# Altium PCB PCB1_Young.PcbDoc
Units mm, origin at the board's own origin, x right, y up, seen from the top; angles counter-clockwise.
Board outline 87.08 x 47.89 mm, 2 copper layers (Top Layer, Bottom Layer); 29 components, 26 nets, 126 pads, 0 vias.
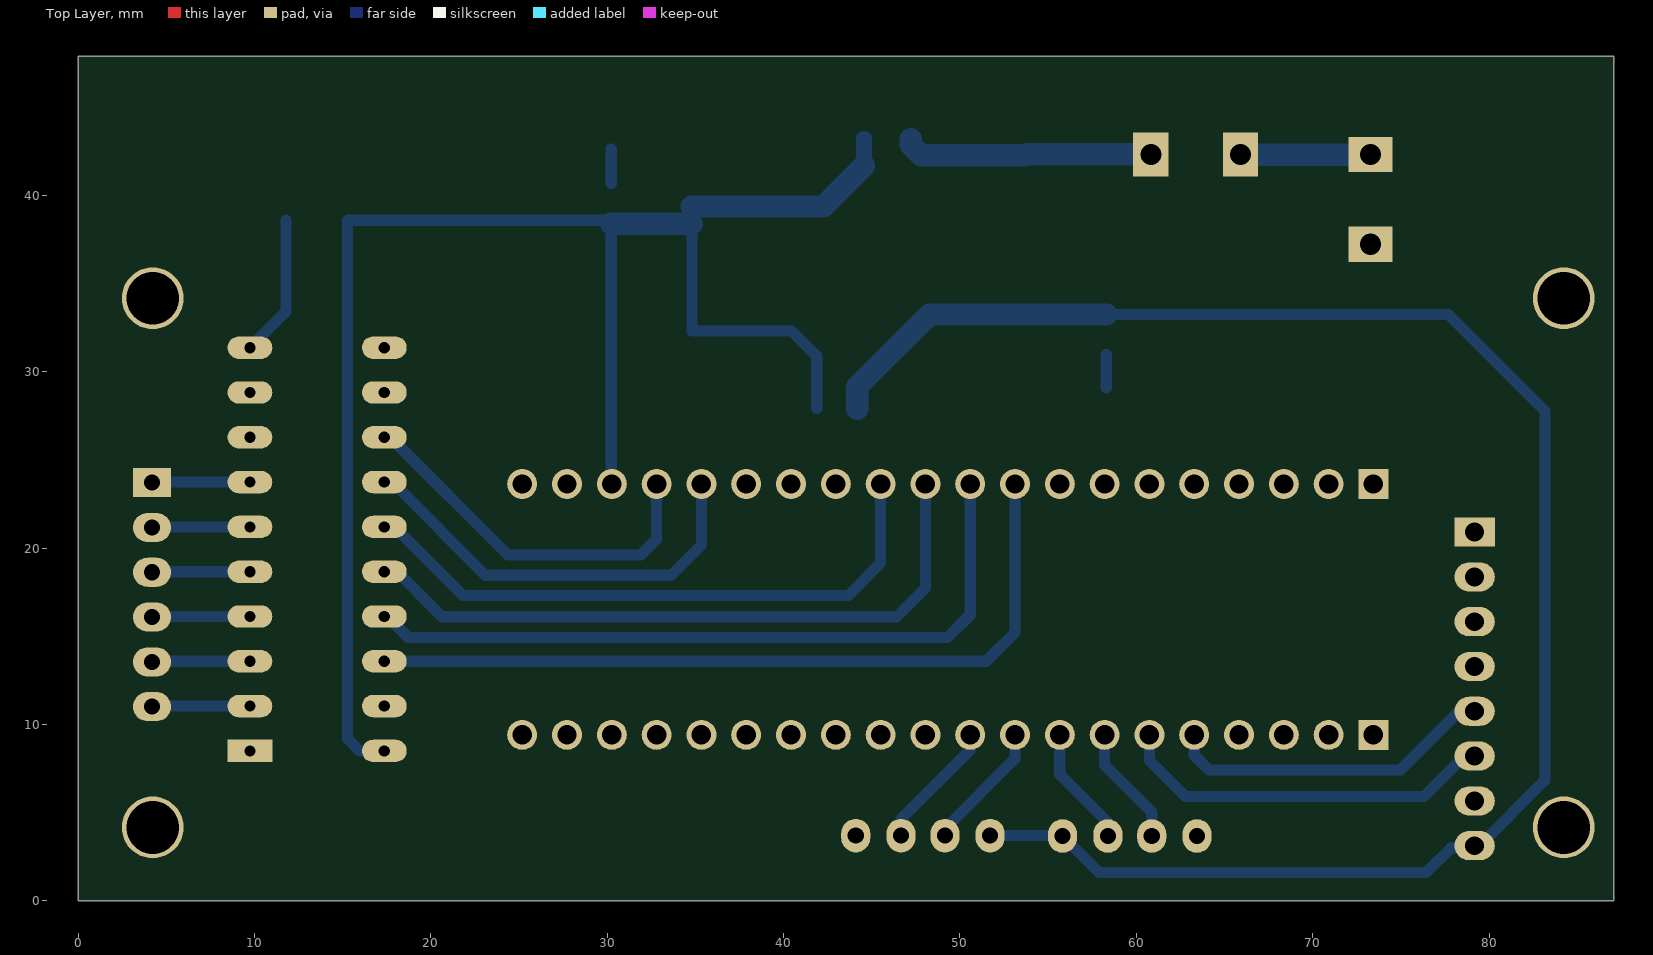
[diagram p0: Top Layer view]
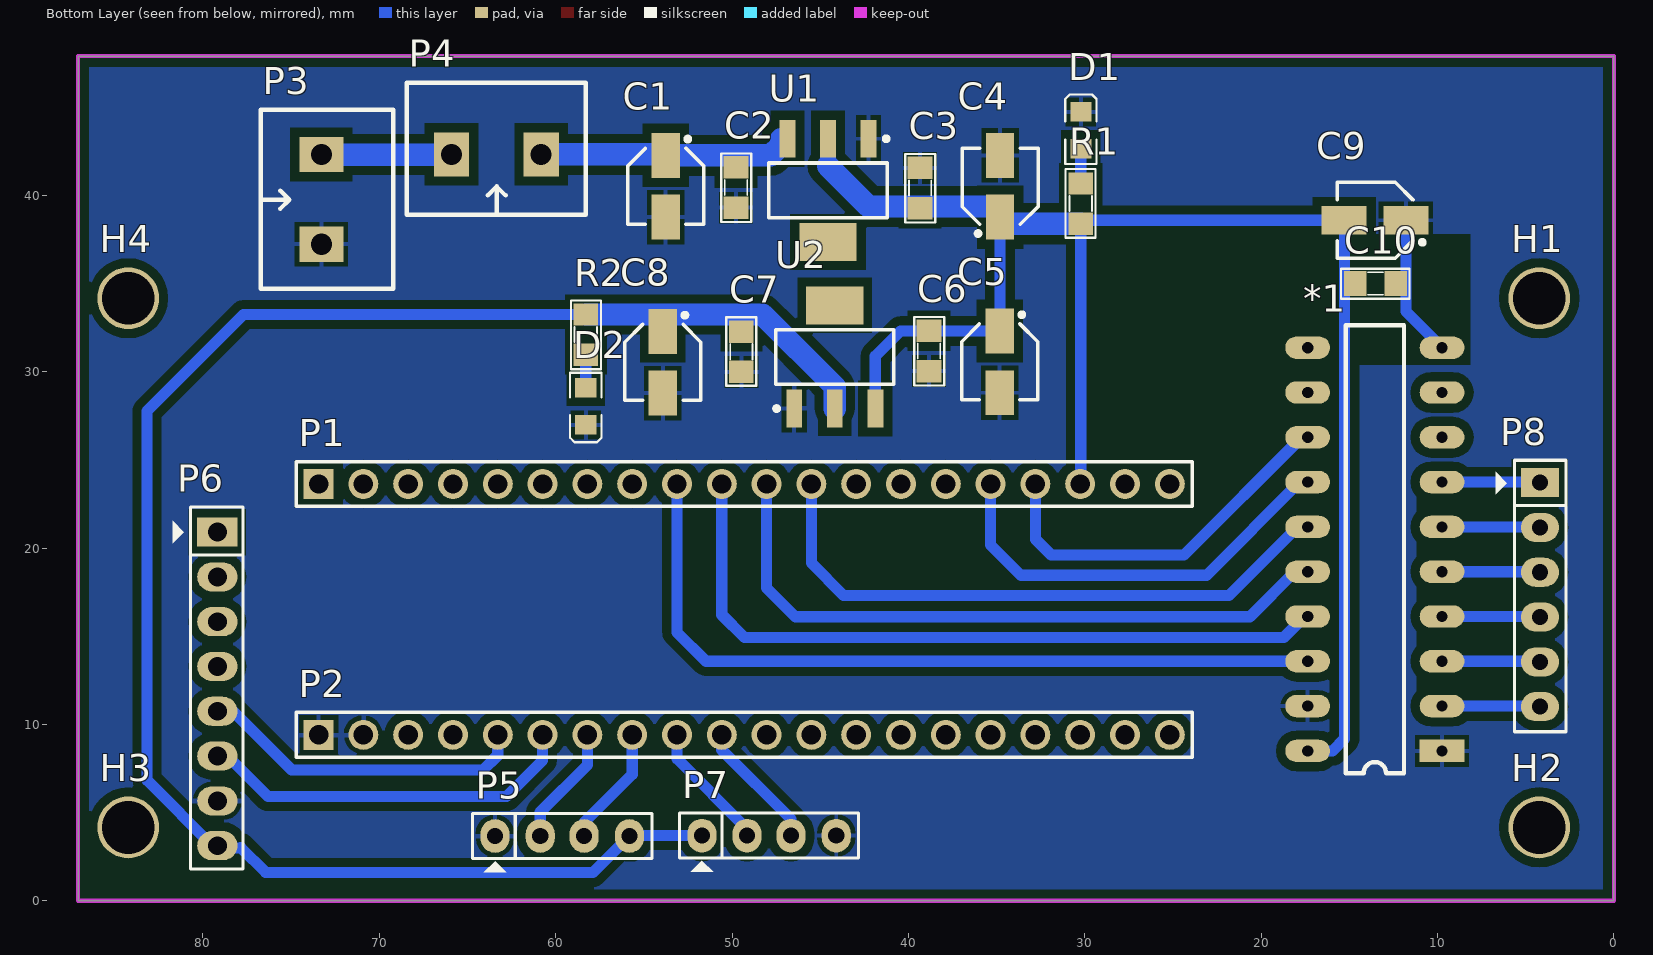
[diagram p1: Bottom Layer view, seen from below]
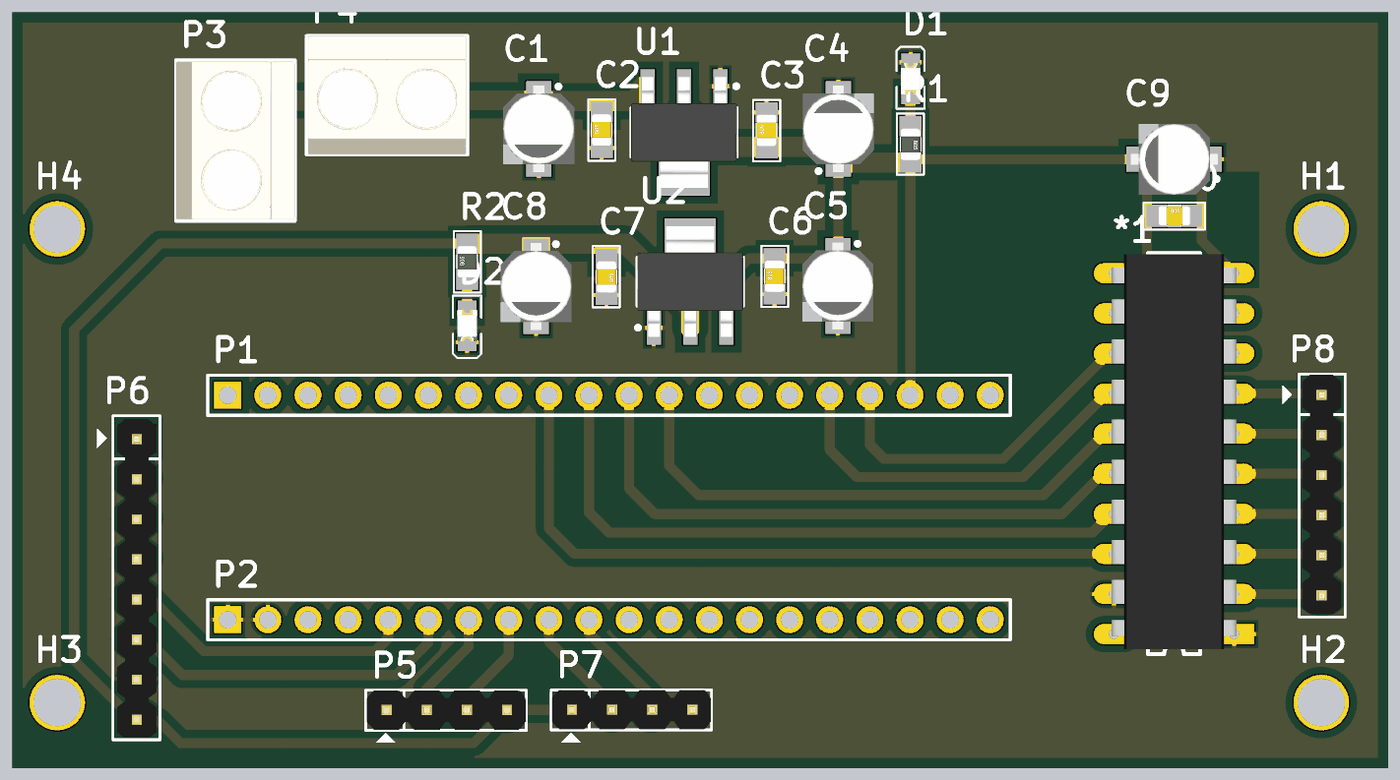
[diagram p2: 3D render of the assembled board from below, using the file's embedded part models]

## Layer stack, top to bottom
Top Solder: solder mask 0.0102, Solder Resist, Dk 3.5
Top Layer: signal copper 0.0356
Dielectric 1: dielectric 0.32, FR-4, Dk 4.8
Bottom Layer: signal copper 0.0356
Bottom Solder: solder mask 0.0102, Solder Resist, Dk 3.5

## Board outline
0,0 87.084,0 87.084,47.894 0,47.894

## Design rules (kind name [scope] priority, off if disabled: settings)
Clearance [All] p1: gap=0.508 ignorepadtopadclearanceinfootprint=FALSE except(0: Arc-Hole Track-Hole SMDPad-Hole THPad-Hole Via-Hole Fill-Hole Poly-Hole Region-Hole Text-Hole)
MinimumSolderMaskSliver [All] p1: minsoldermaskwidth=0
PolygonConnect [All] p1: connectstyle=Relief reliefconductorwidth=0.254 reliefentries=4 polygonreliefangle="90 Angle" airgapwidth=0.254
RoutingVias [All] p1: holewidth=0.5 width=1 viastyle="Through Hole" minholewidth=0.5 minwidth=1 maxholewidth=1 maxwidth=2
SilkToSilkClearance [All] p1: silktosilkclearance=0
SilkToSolderMaskClearance [IsPad] p1: minsilkscreentomaskgap=0 clearancetoexposedcopper=TRUE
SolderMaskExpansion [All] p1: expansion=0.102
Width [All] p1: maxlimit=1.27 minlimit=0.254 preferedwidth=0.635
27 further rules are at their usual default settings.

## Components (designator, comment, footprint, x,y, rotation, side; value= is the part's Value field where it differs from the comment)
*1 "74HC245" DIP20-3D 9.747,8.499 r0 bottom
C1 "Cap Pol SMD" "CAP ALU SIZE B" 53.763,40.508 r270 bottom value=220uF
C2 "Cap Non-Pol SMD" CAP-SM-0805 49.781,39.294 r90 bottom value=100nF
C3 "Cap Non-Pol SMD" CAP-SM-0805 39.343,39.263 r90 bottom value=100nF
C4 "Cap Pol SMD" "CAP ALU SIZE B" 34.804,40.505 r90 bottom value=220uF
C5 "Cap Pol SMD" "CAP ALU SIZE B" 34.828,30.552 r270 bottom value=220uF
C6 "Cap Non-Pol SMD" CAP-SM-0805 38.835,30.028 r90 bottom value=100nF
C7 "Cap Non-Pol SMD" CAP-SM-0805 49.473,32.269 r270 bottom value=100nF
C8 "Cap Pol SMD" "CAP ALU SIZE B" 53.927,30.524 r270 bottom value=220uF
C9 "Cap Pol SMD" "CAP ALU SIZE B" 13.545,38.583 r0 bottom value=220uF
C10 "Cap Non-Pol SMD" CAP-SM-0805 14.671,34.996 r180 bottom value=100nF
D1 "LED SMD" LED_0805_Blue 30.227,43.675 r90 bottom
D2 "LED SMD" LED_0805_Blue 58.294,28.031 r270 bottom
H1 "Hole" "LO KHOAN 3MM" 4.236,34.162 r180 bottom
H2 "Hole" "LO KHOAN 3MM" 4.236,4.162 r180 bottom
H3 "Hole" "LO KHOAN 3MM" 84.236,4.162 r180 bottom
H4 "Hole" "LO KHOAN 3MM" 84.236,34.162 r180 bottom
P1 "Header 21-40" HDR1X20 73.445,23.631 r180 bottom
P2 "Header 1-20" HDR1X20 73.445,9.407 r180 bottom
P3 "Domino 2" "DOMINO 2- 5mm" 73.283,39.765 r90 bottom
P4 "Domino 2" "DOMINO 2- 5mm" 63.365,42.314 r0 bottom
P5 "Header 4" JP4 60.9,3.67 r180 bottom
P6 "Header 8" JP8 79.183,20.903 r270 bottom
P7 "Header 4" JP4 49.174,3.696 r180 bottom
P8 "Header 6" JP6 4.199,23.705 r270 bottom
R1 "RESISTOR SMD" RES-SM-0805 30.234,40.668 r270 bottom value=220
R2 "RESISTOR SMD" RES-SM-0805 58.294,30.952 r90 bottom value=220
U1 "AMS1117-5" SOT230P700X180-4N 44.564,40.278 r270 bottom
U2 "AMS1117-3.3" SOT230P700X180-4N 44.178,30.831 r90 bottom

## Footprints (in the part's own frame and the unit in brackets; to place one, negate y for a bottom-side part, rotate by r counter-clockwise, add the part's x,y. Pads: shape width x height; smd on the part's side, far side on the other; paste and mask are expansions set on the pad)
"CAP ALU SIZE B" [mm] "Capacitor, Aluminium Electrolytric, 4.3mm L X 4.3mm W X 5.4mm H, IPC Medium Density"
  rect 2.55x1.6 smd: 1(-1.75,0) 2(1.75,0)
  silkscreen extent -2.8,-2.15 2.15,2.15, body extent -2.75,-2.25 2.75,2.25, height 5.7
CAP-SM-0805 [mil]
  rect 50x55 smd: 1(0,0) 2(90,0)
  silkscreen extent -32,-34 121,33, body extent 6,-25 84,25, height 31
DIP20-3D [mm]
  rect 2.54x1.27 hole 0.635: 1(0,0)
  oval 2.54x1.27 hole 0.635: 2(0,-2.54) 3(0,-5.08) 4(0,-7.62) 5(0,-10.16) 6(0,-12.7) 7(0,-15.24) 8(0,-17.78) 9(0,-20.32) 10(0,-22.86) 11(7.62,-22.86) 12(7.62,-20.32) 13(7.62,-17.78) 14(7.62,-15.24) 15(7.62,-12.7) 16(7.62,-10.16) 17(7.62,-7.62) 18(7.62,-5.08) 19(7.62,-2.54) 20(7.62,0)
  silkscreen extent 2.16,-24.13 5.46,1.27, body extent -0.15,-24.08 7.77,0.96, height 4.55
"DOMINO 2- 5mm" [mm]
  rect 2x2.5 hole 1.2: 1(-2.54,0) 2(2.54,0)
  silkscreen extent -5.08,-4.08 5.08,3.43, body extent -5,-4.07 5,3.43, height 10
HDR1X20 [mm] "Connector; Header; 20 Position"
  rect 1.7x1.7 hole 1.1: 1(0,0)
  round 1.7 hole 1.1: 2(2.54,0) 3(5.08,0) 4(7.62,0) 5(10.16,0) 6(12.7,0) 7(15.24,0) 8(17.78,0) 9(20.32,0) 10(22.86,0) 11(25.4,0) 12(27.94,0) 13(30.48,0) 14(33.02,0) 15(35.56,0) 16(38.1,0) 17(40.64,0) 18(43.18,0) 19(45.72,0) 20(48.26,0)
  silkscreen extent -1.27,-1.27 49.53,1.27
JP4 [mil] "Jumper 4"
  oval 65x75 hole 36: 1(-100,0) 2(1,0) 3(99,0) 4(200,0)
  silkscreen extent -150,-81 250,50, body extent -148,-48 248,50, height 323
JP6 [mil] "JP6"
  rect 65x85 hole 36: 1(0,0)
  oval 65x85 hole 36: 2(100,0) 3(200,0) 4(300,0) 5(400,0) 6(500,0)
  silkscreen extent -50,-99 556,58, body extent -48,-50 548,48, height 323
JP8 [mil] "JP8"
  rect 65x90 hole 42: 1(0,0)
  oval 65x90 hole 42: 2(100,0) 3(200,0) 4(300,0) 5(400,0) 6(500,0) 7(600,0) 8(700,0)
  silkscreen extent -56,-100 752,57, body extent -48,-50 748,48, height 323
LED_0805_Blue [mm] "Chip LED, 2-Leads, Body 2.0x1.3mm, IPC Medium Density"
  rect 1.1x1.2 smd: 1(-1.05,0) 2(1.05,0)
  silkscreen extent -1.91,-0.89 2.03,0.89, body extent -1,-0.63 1,0.62, height 0.68
"LO KHOAN 3MM" [mil]
  round 138 hole 118.1: 1(0,0)
RES-SM-0805 [mil]
  rect 50x55 smd: 1(0,0) 2(90,0)
  silkscreen extent -32,-34 121,33, body extent 6,-25 84,25, height 31
SOT230P700X180-4N [mm] "SOT223, 4-Leads, Body 6.50x7.00mm (avg), Pitch 2.30mm, IPC Medium Density"
  rect 2.15x0.9 smd: 1(-2.925,2.3) 2(-2.925,0) 3(-2.925,-2.3)
  rect 2.15x3.25 smd: 4(2.925,0)
  silkscreen extent -3.05,-3.35 1.55,3.42, body extent -3.5,-3.35 3.5,3.35, height 1.8

## Part data
C1 C4 C5 C8 C9: "Polarized Capacitor (Radial)"
C2 C3 C6 C7 C10: "Capacitor"
D1 D2: "LED"
H1 H2 H3 H4: "Hole 3mm"
P1 P2: library part "Header 20", "Header, 20-Pin", LatestRevisionDate=17-Jul-2002, LatestRevisionNote="Re-released for DXP Platform.", Publisher="Altium Limited"
P3 P4: "Domino, 2-Pin", LatestRevisionDate=17-Jul-2002, LatestRevisionNote="Re-released for DXP Platform.", Publisher="Altium Limited"
P5 P7: "Header, 4-Pin", LatestRevisionDate=17-Jul-2002, LatestRevisionNote="Re-released for DXP Platform.", Publisher="Altium Limited"
P6: "Header, 8-Pin", LatestRevisionDate=17-Jul-2002, LatestRevisionNote="Re-released for DXP Platform.", Publisher="Altium Limited"
P8: "Header, 6-Pin", LatestRevisionDate=17-Jul-2002, LatestRevisionNote="Re-released for DXP Platform.", Publisher="Altium Limited"
R1 R2: "Resistor"
U1: library part AMS1117-3.3, Package=None, Availability=Unavailable, MF=NEC, MP=AMS1117-3.3, Price=None, SnapEDA_Link=https://www.snapeda.com/parts/AMS1117-3.3/NEC/view-part/?ref=snap
U2: Package=None, Availability=Unavailable, MF=NEC, MP=AMS1117-3.3, Price=None, SnapEDA_Link=https://www.snapeda.com/parts/AMS1117-3.3/NEC/view-part/?ref=snap

## Nets (pads, with @x,y where several pads share a name; then routed paths per layer and width w, separated by ;. In a path a pad name is that pad's centre, name@x,y a point inside that pad or via, vN(x,y) a via of type N, cw(c..) or ccw(c..) an arc to the next point about the centre after c; other vN are vias at no path point)
1_IN1: *1.18 P1.9 | length 44.8
  Bottom Layer w0.635: *1.18 51.485,13.579 53.125,15.22 P1.9
1_IN2: *1.17 P1.10 | length 41.7
  Bottom Layer w0.635: *1.17 17.528,16.119 18.725,14.921 49.29,14.921 50.585,16.217 P1.10
1_IN3: *1.16 P1.11 | length 38.3
  Bottom Layer w0.635: *1.16 18.094,18.659 20.653,16.1 46.403,16.1 48.045,17.742 P1.11
1_IN4: *1.15 P1.12 | length 35
  Bottom Layer w0.635: *1.15 17.943,21.199 21.831,17.31 43.674,17.31 45.505,19.141 P1.12
3.3: C7.1 C8.1 P5.4 P6.8 P7.1 R2.2 U2.2 | length 99.6
  Bottom Layer w0.635: P7.1 55.795,3.696 P5.4 57.893,1.598 76.436,1.598 77.836,2.997 ; R2.2 77.695,33.238 83.176,27.757 83.176,6.836 79.337,2.997 77.836,2.997 ; 77.852,3.014 77.836,2.997
  Bottom Layer w1.27: U2.2 44.178,29.143 48.274,33.238 R2.2
5V: *1.20 C3.1 C4.1 C5.1 C6.2 C9.2 C10.1 P1.18 R1.2 U1.2 U2.3 | length 95.7
  Bottom Layer w0.635: *1.20 15.963,8.499 15.272,9.19 15.272,38.56 C9.2 30.033,38.583 R1.2 30.234,23.663 P1.18 ; C4.1@34.804,38.382 34.804,32.327 C5.1 40.456,32.302 41.878,30.88 U2.3 ; C4.1 C4.1@34.804,39.361
  Bottom Layer w0.889: 44.564,41.669 U1.2
  Bottom Layer w1.27: R1.2 C4.1@34.804,38.382 ; C4.1@34.804,39.361 42.256,39.361 44.564,41.669
CA1: P2.7 P5.2 | length 6.8
  Bottom Layer w0.635: P2.7 58.205,7.701 60.875,5.032 P5.2
CA2: P2.9 P7.2 | length 7.4
  Bottom Layer w0.635: P7.2 49.149,4.079 53.125,8.056 P2.9
CB1: P2.8 P5.3 | length 6.9
  Bottom Layer w0.635: P2.8 55.665,7.162 58.386,4.441 P5.3
CB2: P2.10 P7.3 | length 7.3
  Bottom Layer w0.635: P7.3 46.66,4.632 50.585,8.557 P2.10
GND: *1.1 *1.10 *1.19 C1.2 C2.1 C3.2 C4.2 C5.2 C6.1 C7.2 C8.2 C9.1 C10.2 D1.2 D2.2 P2.1 P2.2 P3.1 P5.1 P6.7 P7.4 U1.1 U2.1 | length 8.1
  Bottom Layer w0.635: *1.10 11.795,33.406 C9.1
Net*1_2: *1.2 P8.6 | length 5.6
  Bottom Layer w0.635: P8.6 4.233,11.039 *1.2
Net*1_3: *1.3 P8.5 | length 5.6
  Bottom Layer w0.635: P8.5 4.233,13.579 *1.3
Net*1_4: *1.4 P8.4 | length 5.6
  Bottom Layer w0.635: P8.4 4.233,16.119 *1.4
Net*1_5: *1.5 P8.3 | length 5.6
  Bottom Layer w0.635: P8.3 4.233,18.659 *1.5
Net*1_6: *1.6 P8.2 | length 5.6
  Bottom Layer w0.635: P8.2 4.233,21.199 *1.6
Net*1_7: *1.7 P8.1 | length 5.6
  Bottom Layer w0.635: P8.1 4.233,23.739 *1.7
NetC1_1: C1.1 C2.2 P4.1 U1.3 | length 14.2
  Bottom Layer w1.27: U1.3@47.205,43.186 47.205,42.863 47.809,42.258 C1.1 53.819,42.314 P4.1
NetD1_1: D1.1 R1.1 | length 2
  Bottom Layer w0.635: D1.1 30.234,42.619 R1.1
NetD2_1: D2.1 R2.1 | length 1.9
  Bottom Layer w0.635: D2.1 R2.1
NetP3_2: P3.2 P4.2 | length 7.4
  Bottom Layer w1.27: P4.2 65.914,42.305 P3.2
PWM1: *1.14 P1.16 | length 24.3
  Bottom Layer w0.635: *1.14 17.823,23.739 23.109,18.453 33.617,18.453 35.345,20.182 P1.16
PWM2: *1.13 P1.17 | length 21.7
  Bottom Layer w0.635: *1.13 17.703,26.279 24.385,19.596 31.906,19.596 32.805,20.495 P1.17
SCL: P2.6 P6.6 | length 21.7
  Bottom Layer w0.635: P2.6 60.745,7.946 62.788,5.904 76.312,5.904 78.61,8.203 P6.6
SDA: P2.5 P6.5 | length 18.8
  Bottom Layer w0.635: P2.5 63.285,8.25 64.124,7.412 74.967,7.412 78.298,10.743 P6.5
VB: P2.20
pads on no net: *1.8 *1.9 *1.11 *1.12 H1.1 H2.1 H3.1 H4.1 P1.1 P1.2 P1.3 P1.4 P1.5 P1.6 P1.7 P1.8 P1.13 P1.14 P1.15 P1.19 P1.20 P2.3 P2.4 P2.11 P2.12 P2.13 P2.14 P2.15 P2.16 P2.17 P2.18 P2.19 P6.1 P6.2 P6.3 P6.4 U1.4 U2.4

## Polygon pours and split planes (outlines as drawn)
GND on Bottom Layer "GND_L02_P012" (solid, remove dead copper, pour order 12): 0,0 87.084,0 87.084,47.894 0,47.894

## Keep-outs
Bottom Layer:
  the board outline again, w0.254

## Other copper
Bottom Layer:
  pour cut-out: -0.254,137.997
  pour cut-out: -0.182,194.63
  pour cut-out: -0.127,19.312
  pour cut-out: 4.512,23.605 4.563,23.555 11.194,23.555 11.194,10.447 10.862,10.116 10.709,10.269 4.385,10.269 4.385,23.533 4.46,23.608
  pour cut-out: 14.671,37.786 14.671,30.397 8.161,30.397 8.161,37.786 11.469,37.786